# Altium PCB XL4015_5A.PcbDoc
Units mm, origin at the board's own origin, x right, y up, seen from the top; angles counter-clockwise.
Board outline 53.65 x 24.17 mm, 2 copper layers (Top Layer, Bottom Layer); 18 components, 7 nets, 35 pads, 74 vias.
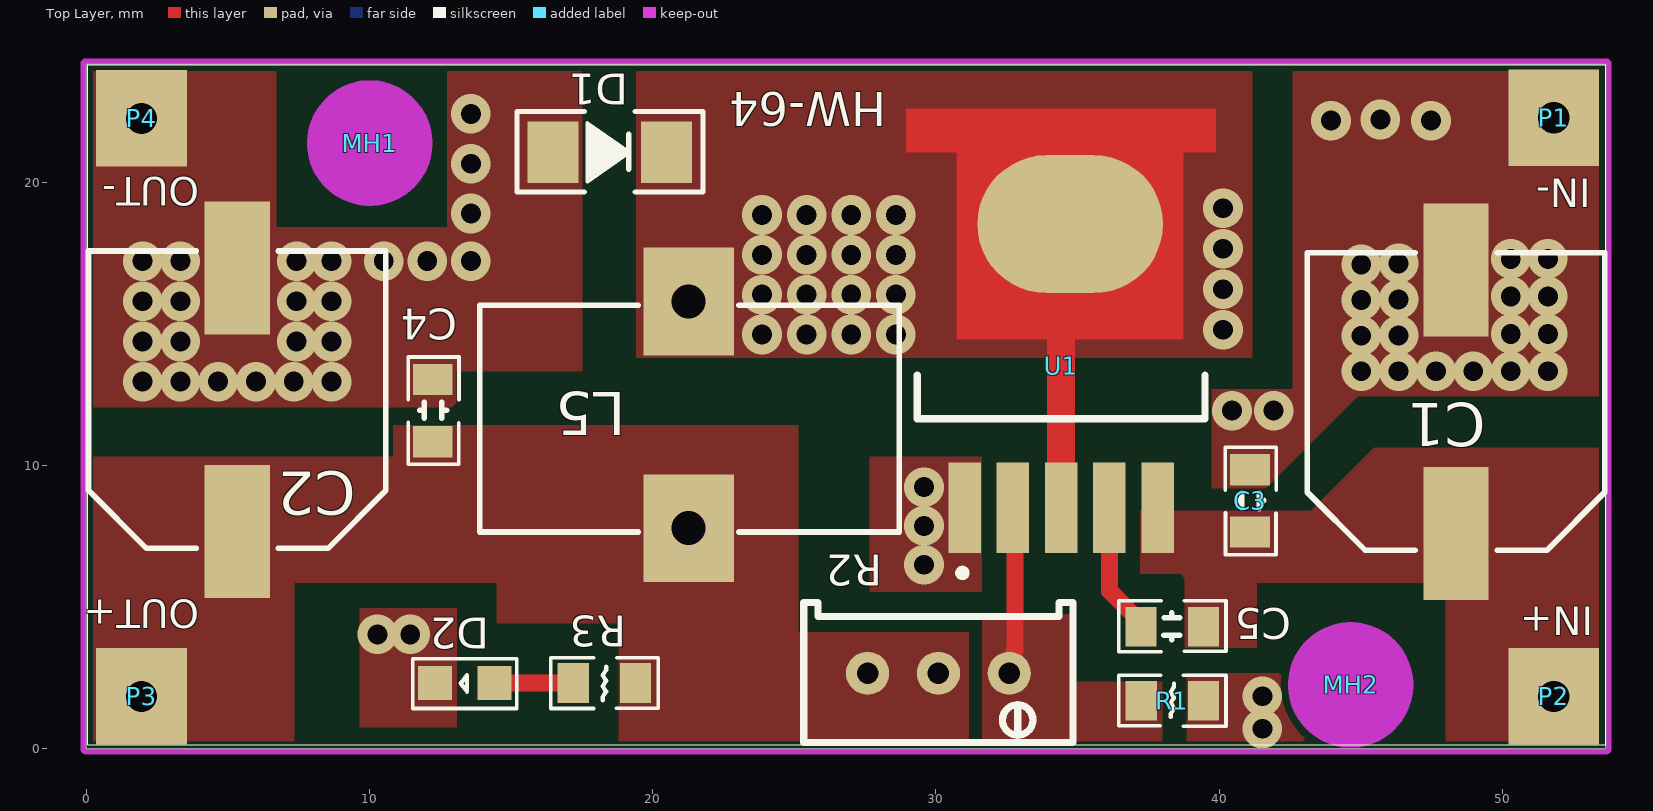
[diagram p0: Top Layer view]
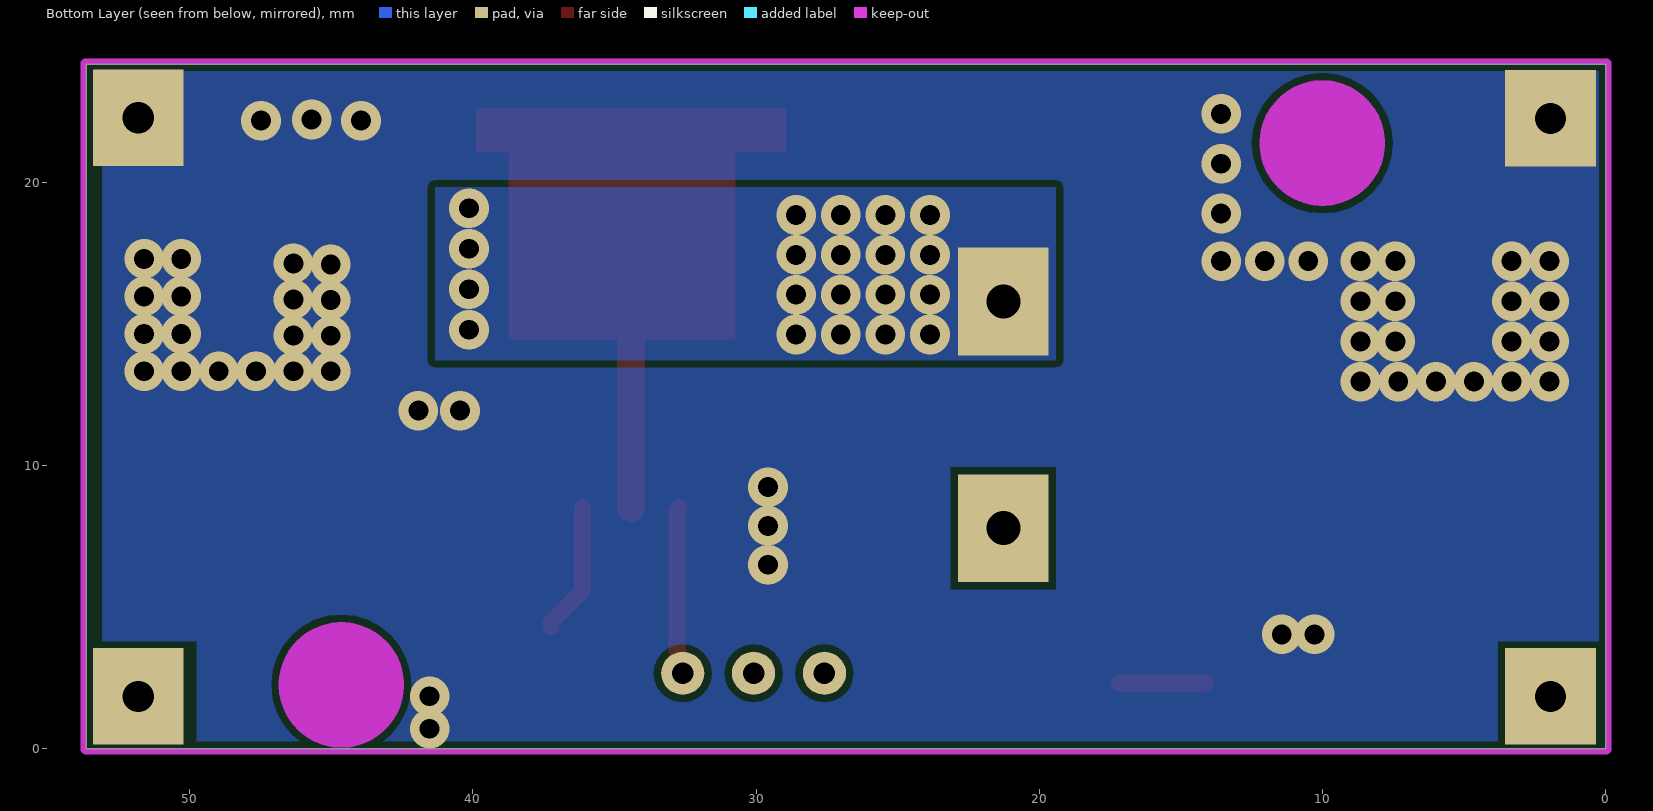
[diagram p1: Bottom Layer view, seen from below]
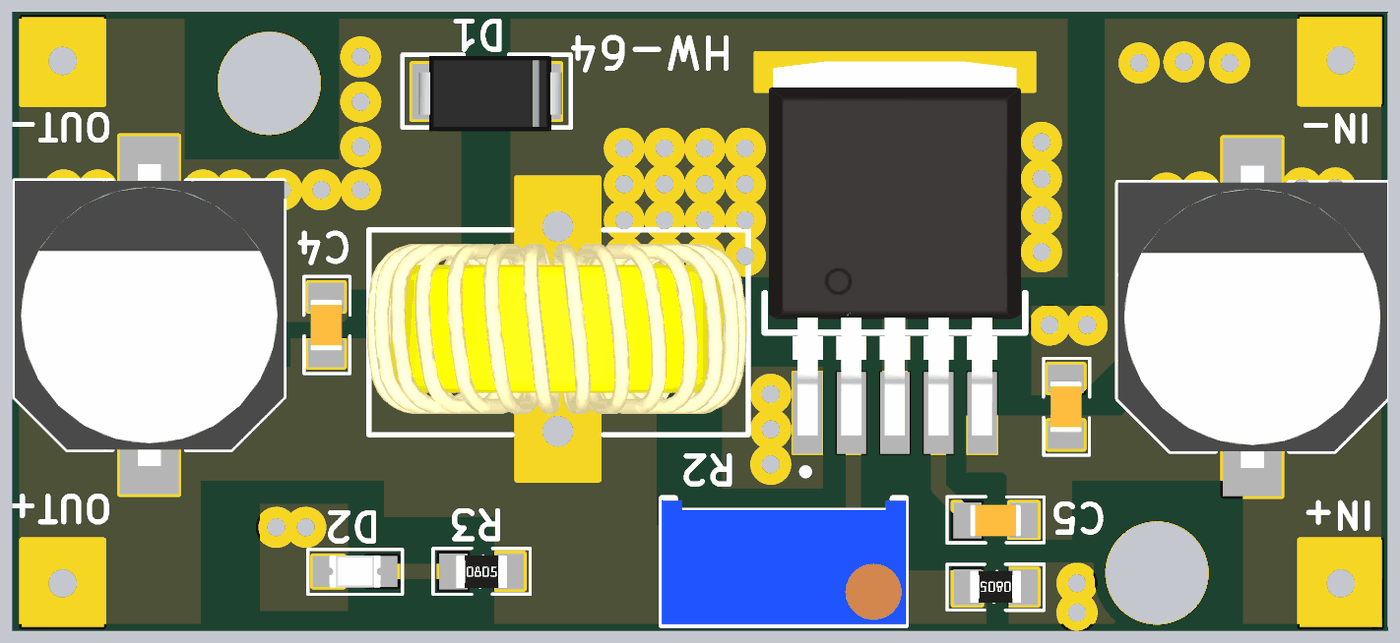
[diagram p2: 3D render of the assembled board from above, using the file's embedded part models]

## Layer stack, top to bottom
Top Solder: solder mask 0.0102, Solder Resist, Dk 3.5
Top Layer: signal copper 0.0356
Dielectric 1: dielectric 0.32, FR-4, Dk 4.8
Bottom Layer: signal copper 0.0356
Bottom Solder: solder mask 0.0102, Solder Resist, Dk 3.5

## Board outline
0,0 53.651,0 53.651,24.165 0,24.165

## Design rules (kind name [scope] priority, off if disabled: settings)
Clearance [All] p1: gap=0.254 ignorepadtopadclearanceinfootprint=FALSE
PolygonConnect [All] p1: connectstyle=Direct reliefconductorwidth=0.254 reliefentries=4 polygonreliefangle="90 Angle" airgapwidth=0.254
RoutingVias [All] p1: holewidth=0.711 width=1.27 viastyle="Through Hole" minholewidth=0.711 minwidth=1.27 maxholewidth=0.711 maxwidth=1.27
SolderMaskExpansion [All] p1: expansion=0.102 istentingtop=FALSE
SupplyNets "Schematic Supply Nets_2" [InNet('GND')] p1: voltage=0.000
SupplyNets "Schematic Supply Nets_1" [InNet('VIN')] p2: voltage=0.000
SupplyNets "Schematic Supply Nets" [InNet('VOUT')] p3: voltage=0.000
Width [All] p1: maxlimit=0.254 minlimit=0.254 preferedwidth=0.254
30 further rules are at their usual default settings.

## Components (designator, comment, footprint, x,y, rotation, side; value= is the part's Value field where it differs from the comment)
C1 "220uF/50V" CAP-SMD_BD9.5-L10.0-W10.0-LS12.4-FD 48.361,12.25 r90 top
C2 "220uF/50V" CAP-SMD_BD9.5-L10.0-W10.0-LS12.4-FD 5.334,12.319 r90 top
C3 "1uF/50V" C0805 41.114,8.741 r90 top
C4 "1uF/50V" C0805 12.265,11.932 r90 top
C5 "1uF/50V" C0805 38.347,4.327 r180 top
D1 "SS34" DO214-AA 18.484,21.05 r0 top
D2 "LEDCHIP-LED0805" CHIP-LED0805 13.362,2.309 r90 top
L5 "47uH/5A" TORIDAL-D13_3A 21.271,11.783 r180 top
MH1 "MOUNTING_HOLE_2MM" MOUNTINGHOLE_2.5_PLATED 10.012,21.377 r0 top
MH2 "MOUNTING_HOLE_2MM" MOUNTINGHOLE_2.5_PLATED 44.64,2.249 r0 top
P1 "Plug" PIN1 51.811,22.272 r0 top
P2 "Plug" PIN1 51.811,1.844 r0 top
P3 "Plug" PIN1 1.957,1.844 r0 top
P4 "Plug" PIN1 1.957,22.25 r0 top
R1 "1kΩ" R0805 38.347,1.694 r0 top
R2 "RPot" 3296Y 30.088,2.663 r0 top
R3 "10kΩ" R0805 18.299,2.315 r180 top
U1 "XL4015E1" TO-263-5_L10.2-W8.9-P1.70-TL 34.421,13.509 r90 top

## Footprints (in the part's own frame and the unit in brackets; to place one, negate y for a bottom-side part, rotate by r counter-clockwise, add the part's x,y. Pads: shape width x height; smd on the part's side, far side on the other; paste and mask are expansions set on the pad)
3296Y [mil]
  round 60 hole 30: CCW(98.42,0) CW(-98.43,0) W(0,0)
  silkscreen extent -187,-96 187,98, body extent -188,-95 188,95, height 455
C0805 [mm]
  rect 1.1x1.4 smd: 1(-1.098,0.025) 2(1.102,0.025)
  silkscreen extent -1.89,-0.9 1.89,0.9, body extent -1,-0.6 1,0.65, height 0.85
CAP-SMD_BD9.5-L10.0-W10.0-LS12.4-FD [mm]
  rect 4.7x2.3 smd: 1(-4.65,0) 2(4.65,0)
  silkscreen extent -5.25,-5.25 5.25,5.25, body extent -5.9,-5.25 5.9,5.25, height 10.5
CHIP-LED0805 [mm]
  rect 1.2x1.2 smd: A(0,-1.05) C(0,1.05)
  silkscreen extent -0.89,-1.84 0.86,1.84, body extent -0.63,-1 0.63,1, height 0.8
DO214-AA [mm]
  rect 1.8x2.18 smd: A(-2,0) C(2,0)
  silkscreen extent -3.27,-1.4 3.3,1.44, body extent -2.65,-1.55 2.95,1.4, height 2.7
MOUNTINGHOLE_2.5_PLATED [mm] "MOUNTINGHOLE_2.5_PLATED"
  round 3.9 hole 4: MOUNT(0,0)
  Top Layer keep-out circle w2.032: c0,0 r1
  Top Layer keep-out circle w2.032: c0,0 r1.2
  Bottom Layer keep-out circle w2.032: c0,0 r1
  Bottom Layer keep-out circle w2.032: c0,0 r1.2
PIN1 [mm]
  rect 3.2x3.4 hole 1.1: 1(0,0)
R0805 [mm]
  rect 1.1x1.4 smd: 1(-1.1,0) 2(1.1,0)
  silkscreen extent -1.89,-0.9 1.89,0.9, body extent -1,-0.61 1,0.64, height 0.52
TO-263-5_L10.2-W8.9-P1.70-TL [mm]
  rect 3.2x1.15 smd paste+0 mask+0.051: 1(-5.008,3.404) 2(-5.008,1.702) 3(-5.008,0) 4(-5.008,-1.702) 5(-5.008,-3.404)
  oval 4.877x6.553 smd: 6(5.008,-0.317)
  Top Layer region: 0.944,3.683 7.548,3.683 7.548,5.461 9.072,5.461 9.072,-5.461 7.548,-5.461 7.548,-4.317 0.944,-4.317 0.944,3.683
  silkscreen extent -7.43,-5.08 -0.33,5.08, body extent -5.89,-4.91 8.72,4.92, height 4.22
TORIDAL-D13_3A [mm]
  rect 3.2x3.8 hole 1.2: 1(0,4) 2(0,-4)
  silkscreen extent -7.43,-3.87 7.37,4.13, body extent -7.38,-3.37 7.46,3.37, height 14.68

## Part data
C1 C2: library part CAP-ELECT-SMD
C3 C4 C5: library part Cap_0805, "Capacitor, X5R, ±10%, 6.3V", Manufacturer=N.A., Specification="X7R, ±10%, 16V"
D1: library part DIODE-DO214-AA, "SMD Diode DO214-AC"
D2: "SMD Lamp beads"
L5: library part Inductor, "Toridal D13 Inductor"
MH1 MH2: library part MOUNTING_HOLE
R1 R3: library part Res_0805, "Resistor, ±1%, 0.200W", Specification=±1%
R2: library part "RPot SM_1", "Square Trimming Potentiometer", AEMS Code=1400226
U1: "Step-down type Adjustable 5A 8V~36V TO-263-5 DC-DC Converters ROHS", Input Voltage=-, JLCPCB Part Class="Extended Part", Manufacturer=XLSEMI(芯龙), Add into BOM=yes, Convert to PCB=yes, Datasheet=https://atta.szlcsc.com/upload/public/pdf/source/20150618/1457707323461.pdf, Device=XL4015E1, Function="Step-down type", LCSC Part Name=XL4015E1, Manufacturer Part=XL4015E1, Number of Outputs=-, Output Current (Max)=-, Supplier=LCSC, Supplier Footprint=TO-263-5, Supplier Part=C51661, Switch tube (built-in/external)=内置, Switching Frequency=-, Symbol=XL4015E1, Synchronous Rectification=-, Topology=-
P1 P2 P3 P4: LatestRevisionDate=17-Jul-2002, LatestRevisionNote="Re-released for DXP Platform.", Publisher="Altium Limited"

## Via types
v1: diameter 1.4, hole 0.7, Top Layer to Bottom Layer, 74 vias

## Nets (pads, with @x,y where several pads share a name; then routed paths per layer and width w, separated by ;. In a path a pad name is that pad's centre, name@x,y a point inside that pad or via, vN(x,y) a via of type N, cw(c..) or ccw(c..) an arc to the next point about the centre after c; other vN are vias at no path point)
GND: C1.2 C2.2 C3.2 C4.2 D1.A D2.C P1.1 P4.1 R1.2 U1.1
  other v1: 41.524,0.7 41.524,1.851 10.29,4.033 11.441,4.033 29.578,6.494 29.578,7.863 29.578,9.232 40.452,11.931 41.921,11.931 1.995,12.955 3.328,12.955 4.662,12.955 5.995,12.955 7.329,12.955 8.662,12.955 45.016,13.32 46.334,13.32 47.651,13.32 48.969,13.32 50.295,13.32 51.604,13.32 1.995,14.373 3.328,14.373 7.432,14.373 8.662,14.373 45.016,14.577 46.334,14.59 50.295,14.643 51.604,14.643 1.995,15.791 3.328,15.791 7.432,15.791 8.662,15.791 45.016,15.834 46.334,15.86 50.295,15.966 51.604,15.966 45.016,17.091 46.334,17.13 1.995,17.21 3.328,17.21 7.432,17.21 8.662,17.21 10.508,17.21 12.046,17.21 13.584,17.21 50.295,17.289 51.604,17.289 13.584,18.89 13.584,20.649 43.945,22.171 47.477,22.171 45.691,22.21 13.584,22.409
NetC5_2: C5.2 U1.4 | length 4.7
  Top Layer w0.6: U1.4 36.123,5.573 37.245,4.451 C5.2
NetD1_C: D1.C L5.2 U1.3 U1.6 | length 10.6
  Top Layer w0.254: U1.3 U1.3@34.739,8.818
  Top Layer w1: U1.3@34.418,8.504 34.418,18.196 U1.6
  other v1: 23.863,14.622 25.437,14.622 27.011,14.622 28.586,14.622 40.135,14.789 23.863,16.027 25.437,16.027 27.011,16.027 28.586,16.027 40.135,16.217 23.863,17.432 25.437,17.432 27.011,17.432 28.586,17.432 40.135,17.646 23.863,18.837 25.437,18.837 27.011,18.837 28.586,18.837 40.135,19.075
NetD2_A: D2.A R3.2 | length 3
  Top Layer w0.254: R3.2@17.193,2.309 R3.2
  Top Layer w0.6: D2.A@14.158,2.309 R3.2@17.193,2.309
NetR1_1: R1.1 R2.CCW U1.2 | length 6
  Top Layer w0.6: R2.CCW 32.765,2.839 32.765,3.449 32.792,3.476 32.792,8.429 U1.2
VIN: C1.1 C3.1 C5.1 P2.1 U1.5
VOUT: C2.1 C4.1 L5.1 P3.1 R2.CW R2.W R3.1
pads on no net: MH1.MOUNT MH2.MOUNT

## Polygon pours and split planes (outlines as drawn)
GND on Bottom Layer (solid, pour order 1): 3.701,3.636 3.701,0 49.739,0 49.739,3.795 53.231,3.795 53.073,3.795 53.073,23.956 0.05,23.956 0.05,3.636
NetD1_C on Bottom Layer (solid, pour order 0): 19.418,19.812 41.325,19.812 41.325,13.716 19.418,13.716
GND on Top Layer "NONET_L02_P-001" (solid, remove dead copper, pour order 10): 43.053,2.667 43.053,0.127 38.862,0.127 38.862,2.667
GND on Top Layer "NONET_L02_P-001" (solid, remove dead copper, pour order 9): 9.652,0.762 9.652,4.953 13.081,4.953 13.081,0.762
VIN on Top Layer (solid, pour order 4): 38.785,3.556 41.325,3.556 41.325,5.859 47.993,5.859 47.993,0.144 53.549,0.144 53.549,10.621 45.453,10.621 43.23,8.399 37.211,8.399 37.211,6.176 38.626,6.176 38.785,6.018
NetD1_C on Top Layer (solid, pour order 8): 41.166,13.796 19.418,13.796 19.418,24.115 41.166,24.115
GND on Top Layer (solid, pour order 7): 0.209,12.05 12.909,12.05 13.068,12.209 13.068,13.32 17.513,13.32 17.513,23.956 12.75,23.956 12.75,18.4 6.718,18.4 6.718,23.956 0.209,23.956
NetR1_1 on Top Layer (solid, pour order 6): 31.641,4.748 31.641,0.144 37.991,0.144 37.991,2.366 34.816,2.366 34.816,4.748
GND on Top Layer (solid, pour order 5): 27.673,5.541 27.673,10.304 31.623,10.304 31.623,5.541
GND on Top Layer (solid, pour order 3): 42.595,12.685 42.595,23.956 53.39,23.956 53.39,12.446 44.896,12.446 41.643,9.193 39.738,9.193 39.738,12.685
VOUT on Top Layer (solid, pour order 2): 0.05,10.304 10.845,10.304 10.845,11.415 25.133,11.415 25.133,4.113 31.165,4.113 31.165,0.144 18.796,0.144 18.796,4.43 14.496,4.43 14.496,5.859 7.353,5.859 7.353,0.144 0.209,0.144 0.209,10.304

## Keep-outs
Keep-Out Layer:
  lines w0.2: -0.1,0 ccw(c0,0) 0,-0.101 ; -0.1,0 ccw(c0,0) 0,-0.101 ; -0.1,0 -0.1,24.165 ; -0.1,24.165 cw(c0,24.165) 0,24.265 ; -0.1,24.165 cw(c0,24.165) 0,24.265 ; 0,-0.101 53.651,-0.101 ; 0,24.265 53.651,24.265 ; 53.651,-0.101 ccw(c53.651,0) 53.751,0 ; 53.651,-0.101 ccw(c53.651,0) 53.751,0 ; 53.651,24.265 cw(c53.651,24.165) 53.751,24.165 ; 53.651,24.265 cw(c53.651,24.165) 53.751,24.165 ; 53.751,0 53.751,24.165

## Silkscreen, mask and mechanical layers (free items; w line width, h text height)
Top Overlay:
  lines w0.002: 0.05,0.144 0.05,24.144 53.65,24.144 53.65,0.144 0.05,0.144
  text "HW-64" at 28.248,23.168 h1.2 r180
  text "OUT-" at 4.001,20.164 h1 r180
  text "IN-" at 53.111,20.123 h1 r180
  text "OUT+" at 3.991,5.261 h1 r180
  text "IN+" at 53.212,5.005 h1 r180

## Text inside footprints (layer, text, board x,y; h text height)
C1: Mechanical 22 "BODY DIA" at 56.907,7.104 h1.52 r90; Mechanical 22 "LEAD SPACING" at 41.607,3.204 h1.52 r90
C2: Mechanical 22 "BODY DIA" at 13.88,7.173 h1.52 r90; Mechanical 22 "LEAD SPACING" at -1.42,3.273 h1.52 r90